# Altium PCB HVPSV3_GaN_system_5_5V_v2.PcbDoc (part 3 of 3)
Units mil, origin at the board's own origin, x right, y up, seen from the top; angles counter-clockwise.
Board outline 3914 x 4092 mil, 4 copper layers (Top Layer, Internal Plane 1, Internal Plane 2, Bottom Layer); 212 components, 159 nets, 925 pads, 655 vias.
Unrouted connection lines stored in the file: 4.
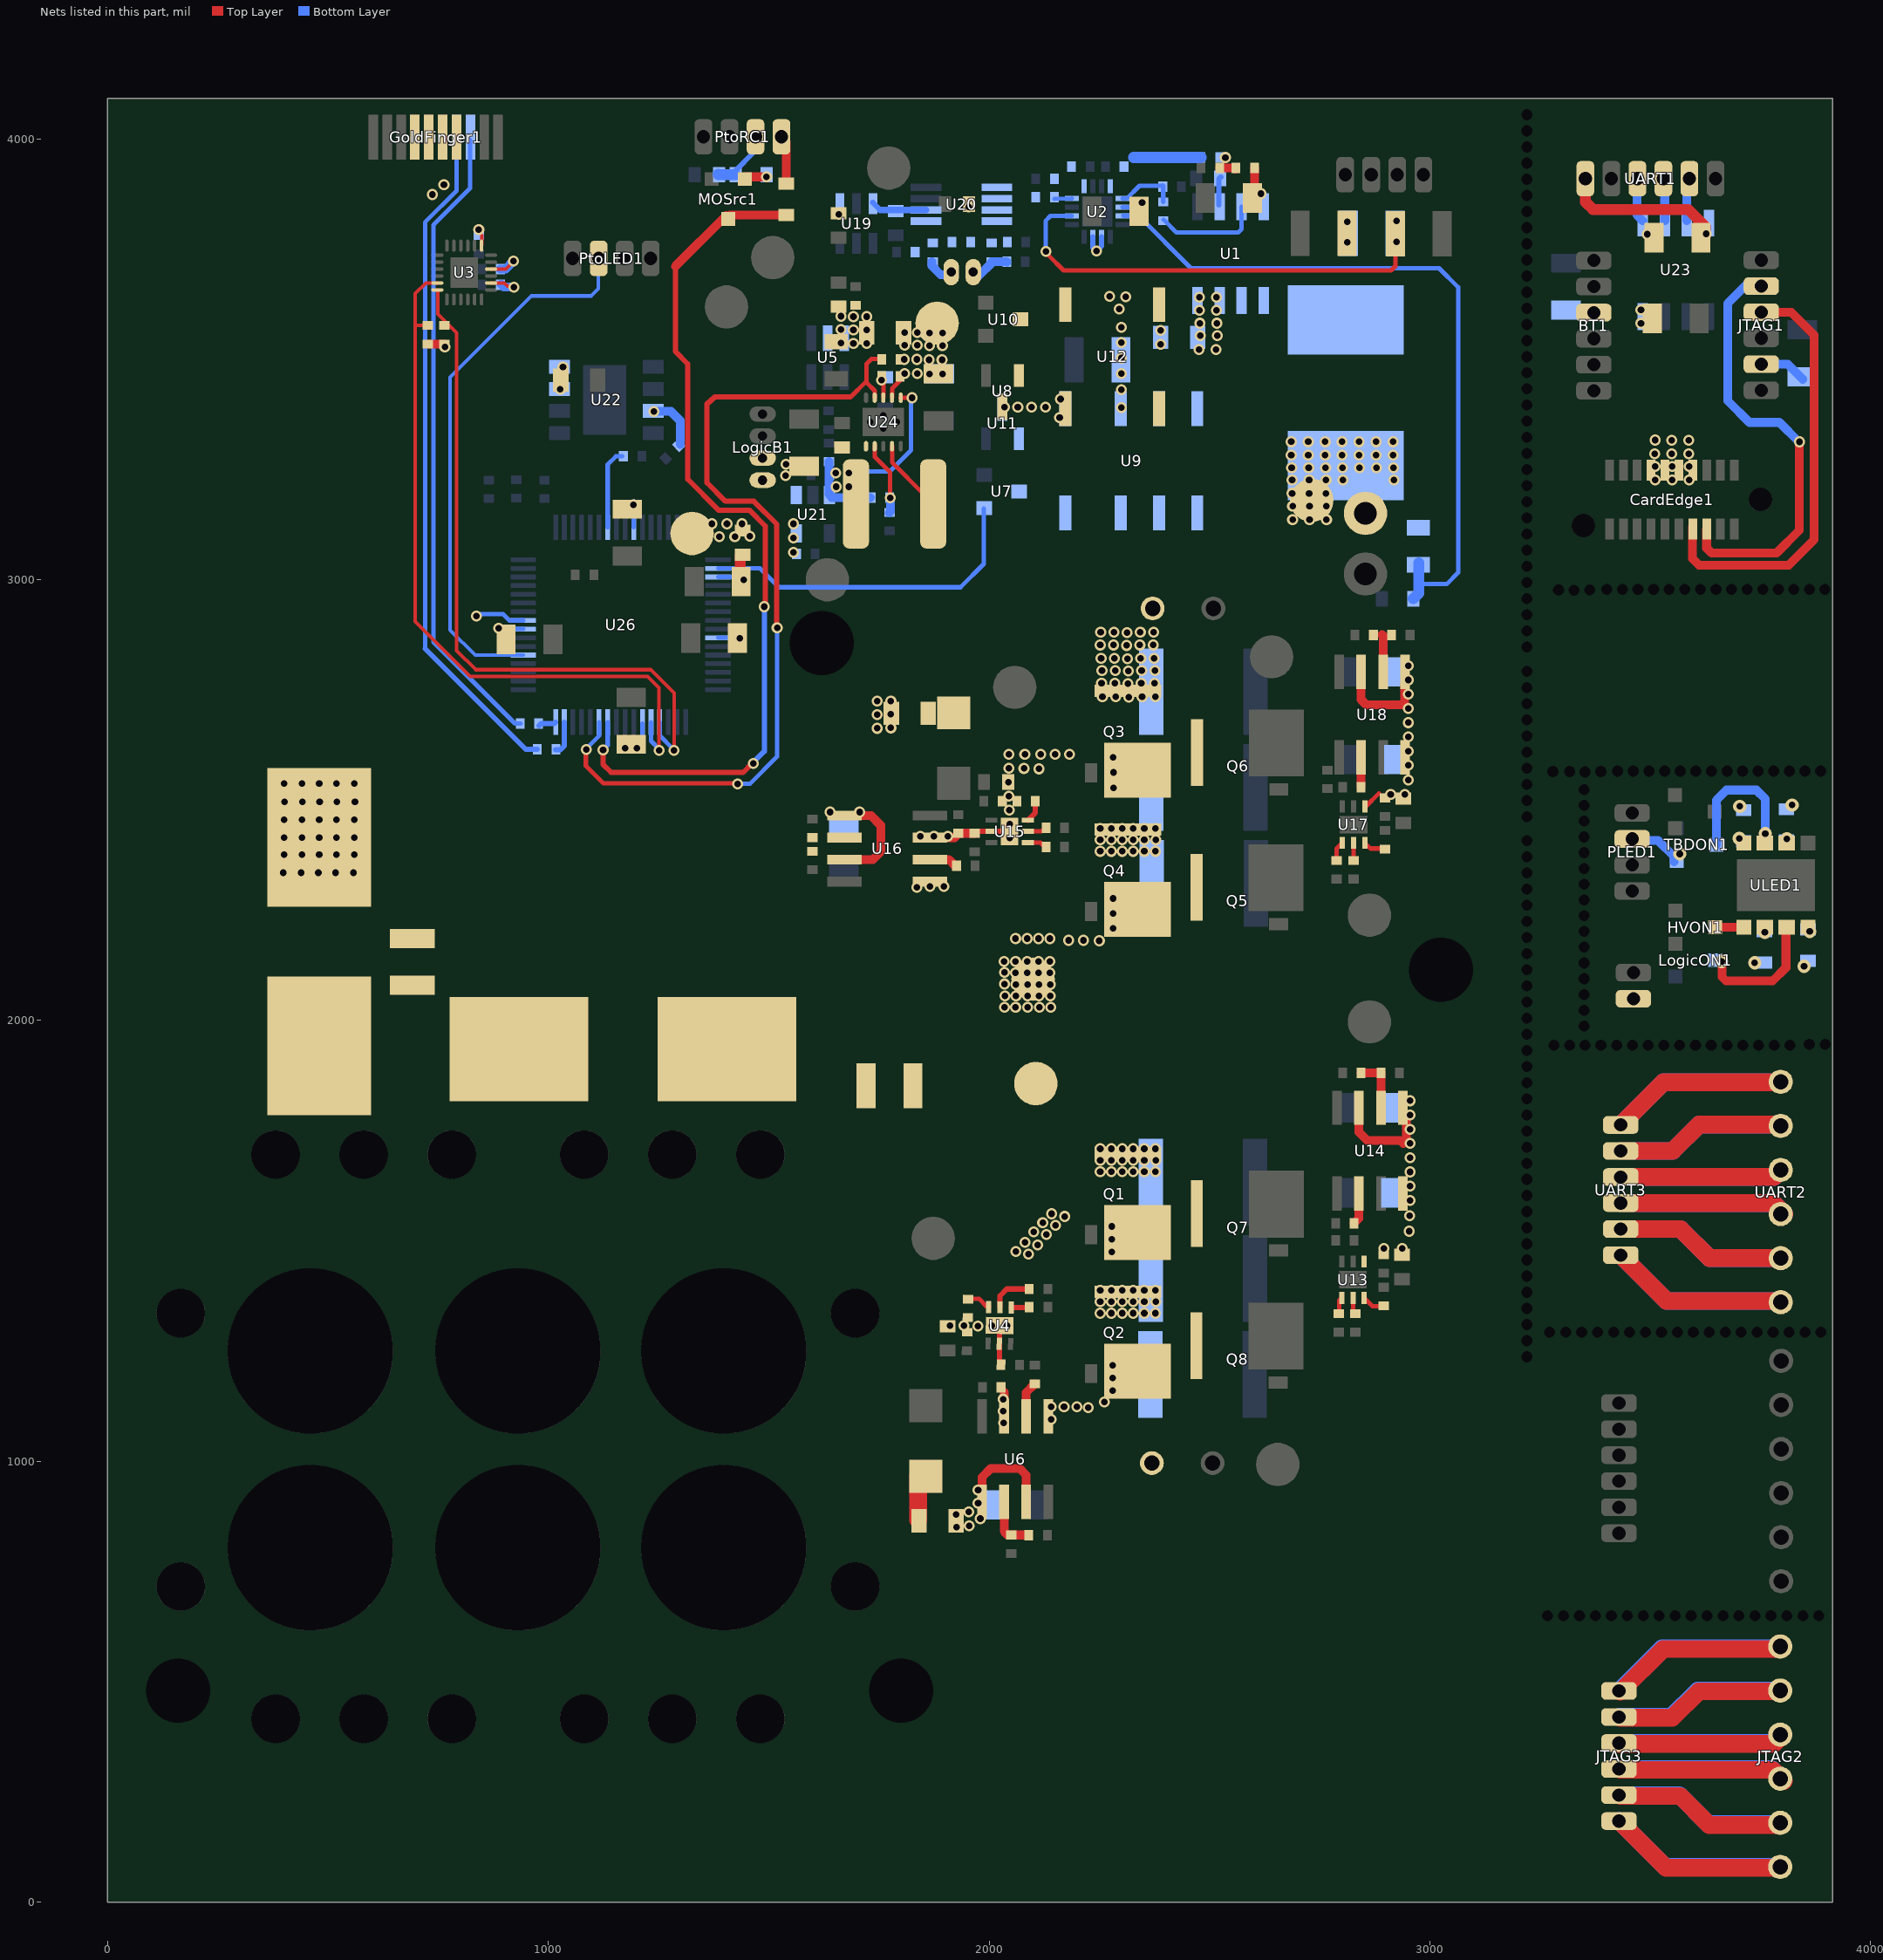
[diagram p4: the nets of this part, all layers, seen from the top]

## Via types
v1: diameter 25, hole 15, Top Layer to Bottom Layer, 625 vias
v2: diameter 30, hole 15, Top Layer to Bottom Layer, 30 vias

## Nets (pads, with @x,y where several pads share a name; then routed paths per layer and width w, separated by ;. In a path a pad name is that pad's centre, name@x,y a point inside that pad or via, vN(x,y) a via of type N, cw(c..) or ccw(c..) an arc to the next point about the centre after c; other vN are vias at no path point) (continued)
NetC4_1: C4.1 U1.6 | length 65.8
  Bottom Layer w12: U1.6@2521,3850.3 2521,3909 C4.1@2526,3914
NetC7_1: C7.1 U3.10 | length 94.5
  Top Layer w8: U3.10@870.02,3704.87 870.15,3705 903,3705 v1@920,3722
  Bottom Layer w20: C7.1@891,3705 903,3705 v1(921,3723)
NetC8_1: C8.1 C9.1 C10.1 C11.1 C12.1 C13.1 C14.1 C15.1 Q1.D Q2.D Q3.D Q4.D U9.3 U9.6 U12.3
  other v1: 2252,1336 2277,1336 2302,1336 2327,1336 2352,1336 2377,1336 2252,1362 2277,1362 2302,1362 2327,1362 2352,1362 2378,1362 2252,1388 2277,1388 2302,1388 2327,1388 2352,1388 2377,1388 2252,1657 2277,1657 2302,1657 2327,1657 2352,1657 2377,1657 2252,1683 2277,1683 2302,1683 2327,1683 2352,1683 2378,1683 2252,1709 2277,1709 2302,1709 2327,1709 2352,1709 2377,1709 2252,2384 2277,2384 2302,2384 2327,2384 2352,2384 2377,2384 2252,2410 2277,2410 2302,2410 2327,2410 2352,2410 2378,2410 2252,2436 2277,2436 2302,2436 2327,2436 2352,2436 2377,2436 2317,2734 2257,2735 2287,2735 2347,2735 2377,2735 2315,2764 2255,2765 2285,2765 2345,2765 2375,2765 2316,2793 2256,2794 2286,2794 2346,2794 2376,2794 2314,2821 2254,2822 2284,2822 2344,2822 2374,2822 2312,2851 2252,2852 2282,2852 2342,2852 2372,2852 2313,2880 2253,2881 2283,2881 2343,2881 2373,2881
NetC21_2: C21.2 C22.1 R31.2 U20.1
NetC22_2: C22.2 C24.1 R32.2 U20.8
NetC26_1: C26.1 U23.4 UART1.0 | length 370.3
  Top Layer w25: UART1.0@3352.83,3910 3352.83,3857.17 3370,3840 3586,3840 3625,3801 C26.1@3625,3779
  other v1: 3627,3785
NetC26_2: C26.2 U23.1 UART1.2 | length 83.1
  Bottom Layer w20: UART1.2@3470,3892 3470,3827.3 U23.1@3483,3814.3
  other v1: 3493,3784
NetC37_1: C37.1 U26.56 | length 64.5
  Bottom Layer w10: v1@883,2892 885,2890 886,2891 v1(887,2890) ; v1@884.16,2888.16 U26.56@943,2888.16
NetC38_1: C38.1 L3.2 U26.19 | length 120.1
  Top Layer w25: C38.1@1434,2993 1435,2994 L3.2@1435,3055
  Bottom Layer w10: U26.19@1385,3006.27 v1@1442.73,3006.27
  other v1: 1443,3000
NetCblock1_2: Cblock1.2 Lr1.2
NetCu1_1: Cu1.1 U4.6 | length 53
  Top Layer w10: Cu1.1@1955,1369 1977.48,1368.61 1994.8,1350.67 1998.95,1350.6 1999.54,1350.59 U4.6@1998.94,1350.01
NetCu8_1: Cu8.1 U13.6 | length 52
  Top Layer w10: U13.6@2851.12,1370.56 2869.46,1352.22 Cu8.1@2895.53,1352.22
NetCu13_1: Cu13.1 U15.6 | length 50.4
  Top Layer w12: U15.6@2087.9,2454.65 2105,2471.75 Cu13.1@2105,2498
NetCu20_1: Cu20.1 U17.6 | length 54.9
  Top Layer w10: U17.6@2852.41,2403.11 2865.2,2390.31 Cu20.1@2902,2390.31
NetDu1_A: Du1.A Ru5.2 | length 107.1
  Top Layer w25: Du1.A@1839,967 Du1.A@1844,972
  Top Layer w40: Ru5.2@1839,867 Du1.A@1839,967
NetDu2_A: Du2.A Ru14.2 | length 2.8
  Top Layer w25: Du2.A@1917,2697 Du2.A@1919,2695
NetFuse1_2: Fuse1.2 MainB1.2 R23.2 Vin.0
  other v1: 2688.5,3136.12 2727,3136.12 2765.5,3136.12 2688.5,3167.12 2727,3167.12 2765.5,3167.12 2687.5,3196.12 2726,3196.12 2764.5,3196.12 2687.5,3226.12 2726,3226.12 2764.5,3226.12 2803,3226.12 2918.5,3226.12 2686.5,3254.12 2725,3254.12 2763.5,3254.12 2802,3254.12 2840.5,3254.12 2879,3254.12 2917.5,3254.12 2685.5,3283.12 2724,3283.12 2762.5,3283.12 2801,3283.12 2839.5,3283.12 2878,3283.12 2916.5,3283.12 2685.5,3313.12 2724,3313.12 2762.5,3313.12 2801,3313.12 2839.5,3313.12 2878,3313.12 2916.5,3313.12
NetHVON1_2: HVON1.2 ULED1.1 | length 59.7
  Top Layer w20: HVON1.2@3647,2212 ULED1.1@3701,2212 ; ULED1.1@3707,2212 ULED1.1@3711,2208
NetJTAG2_0: JTAG2.0 JTAG3.0 | length 816.1
  Top Layer w40: JTAG3.0@3432,181.89 3535.89,78 JTAG2.0@3797,78
  Bottom Layer w40: JTAG3.0@3430,183.89 3533.89,80 JTAG2.0@3795,80
NetJTAG2_1: JTAG2.1 JTAG3.1 | length 794.8
  Top Layer w25: JTAG2.1@3795,175 JTAG2.1@3800,170
  Top Layer w40: JTAG3.1@3432,240.94 3568.06,240.94 3634,175 JTAG2.1@3795,175
  Bottom Layer w25: JTAG2.1@3793,177 JTAG2.1@3798,172
  Bottom Layer w40: JTAG3.1@3430,242.94 3566.06,242.94 3632,177 JTAG2.1@3793,177
NetJTAG2_2: JTAG2.2 JTAG3.2 | length 762.7
  Top Layer w40: JTAG3.2@3432,300 3778,300 JTAG2.2@3803,275
  Bottom Layer w40: JTAG3.2@3430,302 3776,302 JTAG2.2@3801,277
NetJTAG2_3: JTAG2.3 JTAG3.3 | length 744
  Top Layer w40: JTAG3.3@3432,359.06 3780.06,359.06 JTAG2.3@3797,376
  Bottom Layer w40: JTAG3.3@3430,361.06 3778.06,361.06 JTAG2.3@3795,378
NetJTAG2_4: JTAG2.4 JTAG3.4 | length 773.6
  Top Layer w40: JTAG3.4@3432,418.11 3550.11,418.11 3610,478 JTAG2.4@3794,478
  Bottom Layer w40: JTAG3.4@3430,420.11 3548.11,420.11 3608,480 JTAG2.4@3792,480
NetJTAG2_5: JTAG2.5 JTAG3.5 | length 804.2
  Top Layer w40: JTAG3.5@3432,477.17 3528.83,574 JTAG2.5@3794,574
  Bottom Layer w40: JTAG3.5@3430,479.17 3526.83,576 JTAG2.5@3792,576
NetL1_2: L1.2 U24.9 | length 148.3
  Top Layer w10: U24.9@1779.69,3303.88 U24.9@1779.69,3302.88 1779.69,3266.31 1853,3193 L1.2@1853,3186
NetLogicON1_2: LogicON1.2 ULED1.3 | length 283.6
  Top Layer w20: v2@3662,2135 3663,2134 3663,2099 3672,2090 ; 3678,2090 3778,2090 3808,2120 ULED1.3@3808,2212
  other v2: 3662,2134
NetMOSrc1_2: MOSrc1.2 Rrc1.1 U26.42 | length 2024.5
  Top Layer w12: v1@1124,2616 v1(1124,2614) 1124,2581 1142,2563 1442,2563 1462,2583 v1(1465,2583) ; 1288,3711 1288,3518 1316,3490 1316,3228 1386,3158 1456,3158 1492,3122 v1@1492,2940
  Top Layer w20: 1288,3711 MOSrc1.2@1403,3826 ; MOSrc1.2@1405,3820 1412.57,3827.57 Rrc1.1@1540,3827.57
  Bottom Layer w10: v1@1123,2613 v1(1124,2614) 1134.47,2624.47 U26.42@1134.47,2677
  Bottom Layer w12: v1(1465,2583) 1465,2586 1490,2611 1490,2938 v1@1491,2939
  other v1: 1490,2939
NetMOSrc1_3: MOSrc1.3 R49.2 | length 46
  Top Layer w20: MOSrc1.3@1449,3914 v1(1495,3914)
NetR1_1: R1.1 R4.1 R9.2 | length 36.8
  Top Layer w20: R9.2@2523,3934 2557,3934 R4.1@2559,3932
  other v1: 2536,3958
NetR1_2: R1.2 R5.1 U2.16 | length 153
  Bottom Layer w25: 2328,3958 R1.2@2481,3958
NetR2_1: R2.1 R3.2 U2.1 | length 143.2
  Bottom Layer w10: U2.1@2302.36,3864.69 2311.69,3864.69 2341,3894 R2.1@2395,3894 ; R2.1@2394,3895 R2.1@2395,3894 ; R3.2@2395,3857 R2.1@2395,3894
NetR3_1: R3.1 U1.7 | length 242.6
  Bottom Layer w10: R3.1@2396,3817 2425,3788 2565,3788 2573,3796 U1.7@2573,3846.3
NetR7_1: R7.1 R11.2
  other v1: 2813,3766 2813,3812
NetR10_2: R10.2 R13.2 U2.13
NetR11_1: R11.1 R17.2 U2.10 | length 1022.9
  Top Layer w10: v1@2135,3749 2135,3736 2169,3702 2912,3702 2921.85,3711.85 R17.2@2921.85,3785
  Bottom Layer w10: v1@2128,3747 2128,3814 2139.31,3825.31 U2.10@2188,3825.31
  other v1: 2129,3745 2924,3767 2924,3814
NetR12_1: R12.1 U2.12 | length 40
  Bottom Layer w10: R12.1@2148,3864 2148.07,3864 U2.12@2188,3864.69
NetR14_2: R14.2 R16.2 U6.2 | length 121.3
  Top Layer w20: U6.2@2034,908 2034,841 2042,833 R14.2@2045,833 ; R14.2@2049,833 R16.2@2089,833
NetR15_1: R15.1 U6.6 | length 62.3
  Top Layer w20: U6.6@2084,1122 2084,1156 R15.1@2104,1176
NetR18_1: R18.1 U12.6
  other v1: 2389,3534 2389,3566
NetR18_2: R18.2 U1.3 U1.4 U9.4 U9.5
  other v1: 2476,3522 2514.5,3522 2479,3554 2517.5,3554 2478,3582 2516.5,3582 2477,3611 2515.5,3611 2477,3641 2515.5,3641
NetR19_2: R19.2 R21.2 U14.2 | length 125.4
  Top Layer w20: R21.2@2844,1881 2888,1881 R19.2@2889,1880 ; U14.2@2889,1802 R19.2@2889,1880 ; R19.2@2889,1882 R19.2@2889,1880
NetR20_1: R20.1 U14.6 | length 72.6
  Top Layer w20: R20.1@2828,1540 2839,1551 U14.6@2839,1608
NetR22_2: R22.2 U9.2 U9.7
  other v1: 2300,3391 2300,3431 2300,3468 2300,3503 2300,3538 2300,3573 2295,3614 2310,3642 2273,3643
NetR23_1: R23.1 R26.2 U2.3 | length 1657.1
  Bottom Layer w10: U2.3@2305,3826 2339,3826 2458,3707 3021,3707 3064,3664 3064,3016 3038,2990 2978,2990
  Bottom Layer w25: R26.2@2962.43,2957 2975,2969.57 R23.1@2975,3038
NetR24_2: R24.2 R27.2 U16.2
NetR25_1: R25.1 U16.6 | length 64.2
  Top Layer w20: U16.6@1866,2365 1909,2365 R25.1@1924,2350
NetR28_2: R28.2 R30.2 U18.2 | length 86.8
  Top Layer w20: 2891,2876 2893,2874 2894,2874 U18.2@2894,2791
NetR29_1: R29.1 U18.6 | length 66
  Top Layer w20: R29.1@2844,2531 U18.6@2844,2597
NetR31_1: R31.1 TC1.1 | length 50.3
  Bottom Layer w20: R31.1@1870,3722 1870,3712 1890,3692 TC1.1@1902,3692
NetR32_1: R32.1 R33.2 TC1.2 | length 80.7
  Bottom Layer w20: TC1.2@1976,3689 2008,3721 R32.1@2008,3722 ; R32.1@2006,3722 R32.1@2008,3722 ; R33.2@2040,3721 2039,3722 R32.1@2008,3722
NetR36_1: R36.1 R39.2 U24.3 | length 35.9
  Top Layer w10: U24.3@1760,3414.12 R36.1@1760,3450
  other v1: 1756,3453
NetR37_1: R37.1 R40.2 U24.7 | length 166.5
  Top Layer w10: U24.7@1740.31,3303.88 U24.7@1740.31,3302.88 1740.31,3278.68 1775,3244 v1@1775,3187
  Bottom Layer w20: R40.2@1773,3152 R40.2@1774,3153 1776,3155 v1(1776,3186)
NetR46_1: R46.1 U26.7 | length 183.7
  Bottom Layer w10: U26.7@1134.47,3119 1134.47,3261.47 1153,3280 R46.1@1168,3280
NetR47_1: R47.1 U26.48 | length 40.7
  Bottom Layer w12: R47.1@979,2669 984,2674 1013.36,2674 U26.48@1016.36,2677
NetR48_1: R48.1 U26.47 | length 77.7
  Bottom Layer w12: R48.1@1016,2614 1027,2614 1036.05,2623.05 U26.47@1036.05,2677
NetRBLUE1_1: RBLUE1.1 ULED1.6 | length 8.5
  Top Layer w20: ULED1.6@3807,2402 ULED1.6@3813,2408
  other v2: 3810,2412
NetRgreen1_2: Rgreen1.2 ULED1.4 | length 2.8
  Top Layer w20: ULED1.4@3857,2212 ULED1.4@3859,2210
  other v2: 3862,2202
NetRred1_2: Rred1.2 ULED1.2
  other v2: 3760,2200
NetRu1_1: Ru1.1 U4.5 | length 98.8
  Top Layer w12: U4.5@2024.53,1349.56 2024.53,1375.53 2040,1391 Ru1.1@2091,1391
NetRu2_1: Ru2.1 U4.4 | length 40.3
  Top Layer w12: U4.4@2050.12,1349.11 2089.11,1349.11 Ru2.1@2090,1350
NetRu6_1: Ru6.1 U13.5 | length 40.4
  Top Layer w10: U13.5@2825.53,1370.56 2825.53,1336.47 Ru6.1@2830,1332
NetRu7_1: Ru7.1 U13.4 | length 36
  Top Layer w10: Ru7.1@2794,1337 2794,1364.63 U13.4@2799.93,1370.56
NetRu10_1: Ru10.1 U15.5 | length 44.2
  Top Layer w10: U15.5@2087.9,2429.06 2118.06,2429.06 Ru10.1@2128,2439
NetRu11_1: Ru11.1 U15.4 | length 47.7
  Top Layer w10: U15.4@2087.9,2403.47 2116.53,2403.47 Ru11.1@2130,2390
NetRu15_1: Ru15.1 U17.5 | length 40.9
  Top Layer w10: Ru15.1@2825,2363 2826.82,2364.82 U17.5@2826.82,2403.11
NetRu16_1: Ru16.1 U17.4 | length 43.6
  Top Layer w10: Ru16.1@2788,2365 2788,2389.88 U17.4@2801.23,2403.11
NetRWhite1_1: RWhite1.1 ULED1.8
  other v2: 3702,2413
NetTBDON1_2: TBDON1.2 ULED1.7 | length 331.8
  Bottom Layer w20: TBDON1.2@3650,2399 3650,2500 3673,2523 3741,2523 3761,2503 v2(3761,2424) 3761,2401
NetU7_2: U7.2 U9.8 U11.1
NetU8_1: U8.1 U10.2 U12.8
NetU23_2: U23.2 UART1.3 | length 74.8
  Bottom Layer w20: UART1.3@3528,3887 3533,3882 U23.2@3533,3814.3
NetU23_3: U23.3 UART1.4 | length 78.9
  Bottom Layer w20: U23.3@3583,3814.3 3583,3889 UART1.4@3586,3892
NetUART2_0: UART2.0 UART3.0 | length 816.1
  Top Layer w40: UART3.0@3433,1467.89 3536.89,1364 UART2.0@3798,1364
  Bottom Layer w40: UART3.0@3433,1467.89 3536.89,1364 UART2.0@3798,1364
NetUART2_1: UART2.1 UART3.1 | length 794.8
  Top Layer w25: UART2.1@3796,1461 UART2.1@3801,1456
  Top Layer w40: UART3.1@3433,1526.94 3569.06,1526.94 3635,1461 UART2.1@3796,1461
  Bottom Layer w25: UART2.1@3796,1461 UART2.1@3801,1456
  Bottom Layer w40: UART3.1@3433,1526.94 3569.06,1526.94 3635,1461 UART2.1@3796,1461
NetUART2_2: UART2.2 UART3.2 | length 762.7
  Top Layer w40: UART3.2@3433,1586 3779,1586 UART2.2@3804,1561
  Bottom Layer w40: UART3.2@3433,1586 3779,1586 UART2.2@3804,1561
NetUART2_3: UART2.3 UART3.3 | length 744
  Top Layer w40: UART3.3@3433,1645.06 3781.06,1645.06 UART2.3@3798,1662
  Bottom Layer w40: UART3.3@3433,1645.06 3781.06,1645.06 UART2.3@3798,1662
NetUART2_4: UART2.4 UART3.4 | length 773.6
  Top Layer w40: UART3.4@3433,1704.11 3551.11,1704.11 3611,1764 UART2.4@3795,1764
  Bottom Layer w40: UART3.4@3433,1704.11 3551.11,1704.11 3611,1764 UART2.4@3795,1764
NetUART2_5: UART2.5 UART3.5 | length 804.2
  Top Layer w40: UART3.5@3433,1763.17 3529.83,1860 UART2.5@3795,1860
  Bottom Layer w40: UART3.5@3433,1763.17 3529.83,1860 UART2.5@3795,1860
OPERATIONEN: U7.3 U26.18 | length 768.7
  Bottom Layer w10: U26.18@1385,3025.95 1480.05,3025.95 1523,2983 1935,2983 1988,3036 U7.3@1988,3162
PGEC: GoldFinger1.8 R47.2 | length 1448
  Bottom Layer w10: GoldFinger1.8@822,3998 822,3888 739,3805 739,2859 924,2674 R47.2@936,2674 R47.2@937,2674
PGEC_CE: CardEdge1.8 JTAG1.1 | length 958.2
  Top Layer w20: CardEdge1.8@3628.01,3115.14 3628.01,3071.99 3639,3061 3787,3061 3838,3112 v1@3838,3310
  Bottom Layer w20: JTAG1.1@3719,3670 3676,3627 3676,3406 3725,3357 3793,3357 v1@3837,3313
  other v1: 3839,3313
PGED: GoldFinger1.7 R48.2 | length 1540.7
  Bottom Layer w10: 720,2844 720,3811 792,3883 GoldFinger1.7@792,4005
  Bottom Layer w12: 720,2844 949,2615 R48.2@975,2615
PGED_CE: CardEdge1.7 JTAG1.2 | length 983.8
  Top Layer w20: CardEdge1.7@3596,3120 3596,3048 3611,3033 3814,3033 3872,3091 3872,3555 3819.94,3607.06 JTAG1.2@3752,3607.06
POWER+: Fuse1.1 U1.1 U1.2
PS_LBO: R38.1 U24.4 U26.43 | length 1998.6
  Top Layer w10: v1(1086,2615) 1085,2614 1085,2578 1125,2538 v1@1428,2538 ; 1685,3415 1688,3417 1718,3447 1722,3447 ; U24.4@1740.31,3413.12 1740.31,3428.68 1722,3447 ; R38.1@1755,3498 1752,3501 1733,3501 1722,3490 1722,3447
  Top Layer w12: v1@1515,2893 1518,2896 1518,3126 1466,3178 1402,3178 1360,3220 1360,3399 1378,3415 1685,3415
  Bottom Layer w10: v1@1088,2614 1088,2619 1114.79,2645.79 U26.43@1114.79,2677 ; v1(1429,2537) 1457,2537 1519,2599 v1(1519,2891) 1519,2892 v1@1516,2895
RC: C41.1 PtoRC1.3 R49.1 | length 140.3
  Bottom Layer w12: R49.1@1421,3925 1469.94,3973.94 PtoRC1.3@1469.94,4005
  Bottom Layer w25: C41.1@1385,3920 1386,3919 C41.1@1387,3919 R49.1@1424.57,3919
SCL: R6.1 U3.23 U26.37 | length 1655.7
  Top Layer w8: 700,3578 701,3577 R6.1@726,3577 ; U3.23@747.98,3673.38 722.38,3673.38 698,3649 698,2905 822,2781 1225,2781 1251,2755 1251,2617 v1@1249,2615
  Bottom Layer w10: U26.37@1232.9,2677 1232.9,2634.1 v1@1251.5,2615.5
  other v1: 1251,2613
SDA: R8.1 U3.24 U26.36 | length 1574.6
  Top Layer w8: U3.24@747.98,3657.63 749,3656.61 749,3603 792,3560 792,2839 835,2796 1232,2796 1285,2743 v1(1285,2613)
  Bottom Layer w10: U26.36@1252.58,2677 1252.58,2646.42 v1@1284,2615
TANKIN+: Cblock1.1 Cu1.2 Cu2.2 Cu3.2 Cu4.2 Cu6.2 Q1.S Q2.S Q7.D Q8.D TankIn+.0 U4.2 U4.EP U6.5 U6.7 | length 149.1
  Top Layer w12: Cu6.2@2023.09,1219.09 U4.2@2023.09,1266.9 2023.8,1307.59 U4.EP@2023.81,1308.23
  Top Layer w20: U6.7@2034,1111 Cu3.2@2034,1157
  Top Layer w30: U4.EP@2009.9,1308.47 U4.EP@2023.81,1308.23
  other v1: 2033,1087 2141,1095 2032,1114 2225,1122 2141,1124 2170,1124 2199,1124 2261.81,1134.39 2032,1141 2280,1160 2280,1189 2280,1218 1974.33,1307 1911,1308 1942.67,1308 2005.9,1307.9 2040.9,1307.9 2089.56,1470.09 2278,1475 2060.56,1476.09 2110.07,1490.6 2081.07,1496.6 2278,1504 2130.06,1514.59 2101.06,1520.59 2278,1533 2150.56,1535.09 2121.56,1541.09 2171.07,1555.6 2142.07,1561.6
TANKIN-: Cr1.1 Cu13.2 Cu14.2 Cu15.2 Cu16.2 Cu18.2 Q3.S Q4.S Q5.D Q6.D TankIn-.0 U15.2 U15.EP U16.5 U16.7 XFMER1.2 | length 190.2
  Top Layer w12: Cu18.2@1966,2423 1968,2425 1972.06,2429.06 U15.2@2005.22,2429.06 U15.EP@2046.56,2429.06
  Top Layer w20: U16.7@1866,2415 1906,2415 1921,2415 Cu15.2@1931,2425 ; Cu15.2@1930,2425 Cu18.2@1968,2425
  other v1: 2035,2030 2060,2030 2087,2030 2114,2030 2140,2030 2036,2056 2061,2056 2087,2056 2113,2056 2139,2056 2061,2082 2087,2082 2113,2082 2139,2082 2035,2083 2060,2108 2086,2108 2112,2108 2138,2108 2035,2109 2034,2134 2060,2134 2086,2134 2112,2134 2138,2134 2250,2181 2180.5,2182 2214.2,2182 2060,2186 2086,2186 2112,2186 2138,2186 2281,2209 2281,2243 2281,2277 1836,2302 1866,2304 1897,2304 398,2335.4 439,2335.4 478,2335.4 517,2335.4 558,2335.4 400,2376.2 441,2376.2 480,2376.2 519,2376.2 560,2376.2 2047,2414 400,2415 441,2415 480,2415 519,2415 560,2415 1844,2418 1875,2418 1906,2418 2047,2445.67 400,2455.8 441,2455.8 480,2455.8 519,2455.8 560,2455.8 2046,2477.33 401,2496.6 442,2496.6 481,2496.6 520,2496.6 561,2496.6 2045,2509 2282,2528 400,2537.4 441,2537.4 480,2537.4 519,2537.4 560,2537.4 2044,2540.67 2282,2563 2113,2571 2045,2572.33 2079,2572 2281,2597 2045,2604 2081,2604 2117,2604 2150,2604 2182,2604
TBD_LED: PLED1.3 TBDON1.3 | length 86.3
  Bottom Layer w20: PLED1.3@3495,2409 3517,2409 3554,2372 TBDON1.3@3554,2360
  other v2: 3567,2378
TBDON: PtoLED1.2 U26.53 | length 1257
  Bottom Layer w8: U26.53@943,2829.1 833.9,2829.1 777,2886 777,3459 962,3644 1097,3644 1113,3660 1113,3714 PtoLED1.2@1128,3729
TEMP: R12.2 U20.5 U20.6
TEMPREF: C17.1 U19.6 U20.2 | length 127.5
  Bottom Layer w12: U19.6@1736,3856 1752.8,3839.2
  Bottom Layer w15: 1752.8,3839.2 U20.2@1856.5,3839.2
V3.3: C2.1 C3.1 C20.1 C23.1 C36.1 C39.2 C40.2 GoldFinger1.14 GoldFinger1.15 GoldFinger1.16 GoldFinger1.17 L3.1 R6.2 R8.2 R41.2 U3.8 U3.13 U21.5 U22.3 U22.7 U22.8 U26.10 U26.26 U26.38 U26.57 V3.3.0 | length 524.2
  Top Layer w8: U3.13@849,3760 849,3781 ; U3.8@870.02,3673.38 899.62,3673.38 907,3666 v1@923,3666
  Top Layer w20: R6.2@726,3535 R8.2@764,3535
  Bottom Layer w10: v1@839,2919 842,2922 897,2922 911.16,2907.84 U26.57@943,2907.84 ; v1@1173,2621 1174,2620 v1(1174,2618) ; U26.10@1193.53,3119 1193.53,3177.53 v1@1194,3178 ; 1213.21,2632.21 U26.38@1213.21,2674 ; U26.26@1385,2868.47 v1@1426.47,2868.47
  Bottom Layer w20: C2.1@893,3670 899,3664 v1(922,3664) ; v1(1239,3382) 1276,3382 ; 1278,3382 1299,3361 R41.2@1299,3307
  other v1: 1201,2618 1434,2867 837,2918 1556,3062 1556,3094.5 1388,3098 1423,3098 1457,3099 1371.13,3127 1405.13,3127 1439.13,3127 1556,3127 1193,3170 1027,3432 1033,3483 765,3528 842,3794 737,3874 763,3896
V3.3_CE: BT1.3 C27.1 C34.2 C35.1 CardEdge1.14 CardEdge1.15 CardEdge1.16 CardEdge1.17 JTAG1.4 U23.8 | length 108.1
  Bottom Layer w20: JTAG1.4@3752,3488.94 3812.06,3488.94 C34.2@3846,3455
  other v1: 3511.5,3226.12 3550,3226.12 3588.5,3226.12 3511.5,3257.12 3550,3257.12 3588.5,3257.12 3510.5,3286.12 3549,3286.12 3587.5,3286.12 3549,3316.12 3587.5,3316.12 3511,3317 3479,3582 3479,3612
V5V: C28.1 C29.1 Cu5.1 Cu7.1 Cu9.1 Cu10.1 Cu11.1 Cu17.1 Cu19.1 Cu21.1 Cu22.1 Cu23.1 L2.1 R36.2 R38.2 Ru5.1 Ru14.1 U6.1 U6.3 U8.3 U9.1 U11.3 U12.1 U13.1 U14.1 U14.3 U14.8 U16.1 U16.3 U17.1 U18.1 U18.3 U18.8 U24.2 V5V.0 | length 953.4
  Top Layer w10: U24.2@1779.69,3414.12 1779.69,3433.69 R36.2@1799,3453 ; U17.1@2852.41,2485.78 2854.78,2485.78 2884,2515 ; Cu21.1@2898,2505 Cu21.1@2908,2505
  Top Layer w20: U16.1@1672,2465 1732,2465 1754,2443 1754,2383 1736,2365 U16.3@1684,2365 ; U6.1@1984,908 1984,964 2004,984 2069,984 2084,969 U6.3@2084,934 ; U14.3@2839,1802 2839,1747 2858,1728 2933,1728 2940,1721 ; U18.3@2844,2784 2844,2728 2856,2716 2943,2716 U18.1@2943,2762 ; v1@2947,1729 U14.1@2947,1775
  other v1: 1926,851 1955,854 1980,870 1925,879 1954,885 1975,905 1975,935 2896,1483 2937,1483 2953,1522 2954,1557 2955,1592 2955,1624.29 2955,1656.57 2955,1688.86 2955,1721.14 2955,1753.43 2955,1785.71 2955,1818 1639,2473 1706,2473 2911,2513 2943,2513 2951,2546 2951,2579 2951,2611.29 2951,2643.57 1746,2663 1777,2664 2951,2675.86 1746,2694 1777,2695 2951,2708.14 1746,2725 1777,2725 2951,2740.43 2951,2772.71 2951,2805 2160,3368 2035,3392 2065,3392 2096,3392 2128,3392 2162,3410 1865,3467 1894,3467 1808,3468 1837,3468 1864,3499 1893,3499 1807,3500 1836,3500 1865,3531 1894,3531 1808,3532 1837,3532 1865,3560 1894,3560 1808,3561 1837,3561
V5VANG: C1.1 C5.1 C6.1 C16.1 C18.1 C30.1 C31.1 L2.2 R4.2 U1.8 U2.2 U2.6 U2.7 U5.5 U5.6 U19.4 U20.7 | length 178.5
  Top Layer w20: C1.1@2595,3861 2602,3868 R4.2@2602,3934
  Bottom Layer w10: U2.2@2302.36,3845 2329,3845 2334,3850
  Bottom Layer w12: U2.7@2235.34,3777.98 2235.34,3753.66 v1@2241,3748 ; v1(2244,3746) 2255.02,3757.02 U2.6@2255.02,3777.98
  other v1: 1692,3536 1722,3536 1664,3537 1692,3566.5 1722,3566.5 1664,3567.5 1692,3597 1722,3597 1664,3598 1659,3829 1954,3846 2347,3856 2617,3876
VBAT: C19.1 C25.1 C33.1 L1.1 LogicB1.3 LogicB1.4 R34.2 R37.2 U21.1 U21.3 U24.1 U24.6 | length 529.7
  Top Layer w10: U24.1@1799.37,3413.12 1816.12,3413.12 1820.5,3417.5 v1@1822,3419
  Bottom Layer w10: U21.3@1641,3189 U21.3@1643,3186 ; 1676,3193 1676,3225 1697,3246 1775,3246 1823,3294 1823,3416 1821.5,3417.5 v1@1821,3418 ; R37.2@1732,3189 1733,3189 R37.2@1735,3187
  Bottom Layer w20: R34.2@1637,3268 1637,3242 1637,3194 U21.3@1639,3192 ; U21.3@1643,3186 R37.2@1731,3186
  other v1: 1653,3211 1682,3211 1538,3236 1652,3242 1682,3242 1539,3262 1825,3413
VBAT_LED: PVBAT1.1 RBLUE1.2 Rgreen1.1 Rred1.1 RWhite1.2
  other v2: 3849,2123 3737,2131 3703,2486 3822,2489
VRC: PtoRC1.4 Rrc1.2 | length 111.6
  Top Layer w20: PtoRC1.4@1529,4005 1540,3994 Rrc1.2@1540,3898.43 Rrc1.2@1540,3898
XFMER+: Cr1.2 Lr1.1 XFMER1.1
pads on no net: Bobbin1.1 Bobbin1.2 Bobbin1.4 CardEdge1.0 CardEdge1.18 CardEdge1.19 CardEdge1.20 GoldFinger1.18 GoldFinger1.19 GoldFinger1.20 JTAG1.0 PtoRC1.2 U3.1 U3.2 U3.3 U3.4 U3.5 U3.6 U3.7 U3.12 U3.14 U3.15 U3.16 U3.17 U3.19 U3.21 U8.2 U11.2 U19.3 U19.5 U20.4 U21.4 U26.1 U26.2 U26.3 U26.11 U26.22 U26.23 U26.24 U26.27 U26.28 U26.30 U26.35 U26.39 U26.40 U26.44 U26.45 U26.46 U26.50 U26.51 U26.58 U26.59 U26.64 UART1.1 UART1.5

## Polygon pours and split planes (outlines as drawn)
V5V on Bottom Layer "Bottom Layer-No Net 1" (solid, pour order 315): 1921,3446 1927,3452 1927,3566 1913,3580 1802,3580 1795,3573 1795,3455 1804,3446
VBAT on Bottom Layer "Bottom Layer-No Net 1" (solid, pour order 313): 1625,3179 1633,3171 1739,3171 1742,3174 1742,3269 1731,3280 1625,3280
VBAT on Bottom Layer "Bottom Layer-No Net 1" (solid, pour order 311): 1575,3195 1575,3282 1566,3291 1563,3294 1475,3294 1466,3294 1455,3283 1455,3217 1463,3209 1464,3208 1475,3208 1513,3208 1550,3171 1575,3171 1575,3195
GND on Bottom Layer "Bottom Layer-No Net 1" (solid, pour order 309): 1846,3384 1853,3391 1913,3391 1922,3382 1922,3333 1915,3326 1854,3326 1846,3334
GND on Bottom Layer "Bottom Layer-No Net 1" (solid, pour order 307): 1750,3402 1719,3402 1713,3396 1713,3333 1720,3326 1798,3326 1805,3333 1805,3392 1795,3402 1750,3402
GND on Bottom Layer "Bottom Layer-No Net 1" (solid, pour order 305): 20 vertices, not listed, extent 1455,3171 1645,3464
V5VANG on Bottom Layer "Bottom Layer-No Net 1" (solid, pour order 299): 1623,3519 1623,3591 1627,3595 1737,3595 1740,3592 1740,3525 1734,3519 1623,3519
GND on Bottom Layer "Bottom Layer-No Net 1" (solid, pour order 277): 2754,1589 2754,1834 2767,1847 2798,1847 2808,1837 2808,1576 2807,1575 2768,1575
V5V on Bottom Layer "Bottom Layer-No Net 1" (solid, pour order 275): 2913,1587 2913,1828 2923,1838 2958,1838 2967,1829 2967,1589 2951,1573 2927,1573
V5V on Bottom Layer "Bottom Layer-No Net 1" (solid, pour order 239): 2907,2573 2907,2814 2917,2824 2952,2824 2961,2815 2961,2575 2945,2559 2921,2559
GND on Bottom Layer "Bottom Layer-No Net 1" (solid, pour order 233): 1620,2342 1727,2342 1734,2335 1734,2296 1726,2288 1622,2288 1614,2296 1614,2335 1621,2342
V5V on Bottom Layer "Bottom Layer-No Net 1" (solid, pour order 231): 1620,2496 1727,2496 1734,2489 1734,2450 1726,2442 1622,2442 1614,2450 1614,2489 1621,2496
GND on Bottom Layer "Bottom Layer-No Net 1" (solid, pour order 205): 844,4055.5 844,3875.5 853,3867.5 854,3867.5 889,3867.5 897,3875.5 897,4011.5 897,4054.5 896,4055.5 895,4056.5 844,4056.5
NetC8_1 on Bottom Layer "Bottom Layer-No Net 1" (solid, pour order 175): 44 vertices, not listed, extent 2229,961 2395,2995
GND on Bottom Layer "GND" (solid, pour order 199): 1689,3768 1689,3789 1695,3795 1789,3795 1800,3784 1800,3738 1791,3729 1719,3729 1698,3729 1689,3738 1689,3767
GND on Bottom Layer "Bottom Layer-No Net 1" (solid, pour order 211): 780,3749 854,3749 859,3744 859,3669 859,3657 854,3652 852,3650 784,3650 774,3660 774,3726 774,3743
V3.3 on Bottom Layer "Bottom Layer-No Net 1" (solid, pour order 217): 1564.34,3148 1527,3148 1502,3173 1381,3173 1338,3130 1338,3094 1360,3072 1515,3072 1544,3043 1571,3043 1575.5,3047.5 1575.5,3138.58
V5V on Bottom Layer "Bottom Layer-No Net 1" (solid, pour order 283): 1942,851 1942,958 1949,965 1988,965 1996,957 1996,853 1988,845 1949,845 1942,852
GND on Bottom Layer "Bottom Layer-No Net 1" (solid, pour order 285): 2119,851 2119,958 2126,965 2165,965 2173,957 2173,853 2165,845 2126,845 2119,852
TANKIN- on Bottom Layer "Bottom Layer-No Net 1" (solid, pour order 291): 726,2061 604,2183 604,2496 604,2565 582,2587 369,2587 355,2573 355,1796 374,1777 696,1777 726,1807
GND on Bottom Layer "Bottom Layer-No Net 1" (solid, pour order 177): 2559,2979.37 2559,1052 2534,1027 2491,1027 2470.75,1006.75 2470.75,981.25 2487,965 2672,965 2706,999 2706,2155 2706,2955 2675,2986 2565,2986
NetR1_1 on Top Layer "Bottom Layer-No Net 1" (solid, pour order 333): 2513,3936 2513,3963 2522,3972 2560,3972 2570,3962 2570,3940 2570,3922 2569,3921 2514,3921 2513,3922
GND on Top Layer "Bottom Layer-No Net 1" (solid, pour order 329): 2123,940 2123,953 2129,959 2155,959 2160,954 2160,857 2156,853 2152,849 2127,849 2123,853 2123,859 2123,940
GND on Top Layer "Bottom Layer-No Net 1" (solid, pour order 327): 1710,2326 1723,2326 1729,2320 1729,2294 1724,2289 1627,2289 1623,2293 1619,2297 1619,2322 1623,2326 1629,2326 1710,2326
V5V on Top Layer "Bottom Layer-No Net 1" (solid, pour order 325): 1972,836 1908,836 1908,894.5 1942.5,894.5 1953,905 1953,977 1970,994 2009,994 2009,977 1996,964 1996,860
V5V on Top Layer "Bottom Layer-No Net 1" (solid, pour order 323): 1626,2468 1626,2491 1631,2496 1755,2496 1764,2487 1764,2440 1744,2440 1731,2453 1630,2453 1626,2457 1626,2468
GND on Top Layer "Bottom Layer-No Net 1" (solid, pour order 303): 1623,3454 1623,3489 1625,3491 1680,3491 1682,3489 1682,3439 1682,3438 1680,3436 1627,3436 1623,3440 1623,3454
GND on Top Layer "Bottom Layer-No Net 1" (solid, pour order 301): 1729,3668 1729,3770 1729,3785 1724,3790 1646,3790 1640,3784 1640,3661 1642,3659 1720,3659
V5VANG on Top Layer "Bottom Layer-No Net 1" (solid, pour order 297): 1740,3619 1727,3632 1726,3633 1638,3633 1624,3619 1624,3544 1624,3523 1627,3520 1730,3520 1740,3530
TANKIN+ on Top Layer "Bottom Layer-No Net 1" (solid, pour order 281): 28 vertices, not listed, extent 1894,1062 2047,1336
+BRVDDA on Top Layer "Bottom Layer-No Net 1" (solid, pour order 279): 2003,1281 1987,1281 1966,1260 1905,1260 1819,1174 1819,1141 1852,1108 1961,1108 1968,1101 1968,1063 1995,1063 1995,1244 2004,1253 2004,1281 1987,1281
+BRVOB on Top Layer "Bottom Layer-No Net 1" (solid, pour order 273): 2796,1502 2796,1550 2794,1552 2758,1552 2753,1547 2746,1540 2746,1493 2746,1468 2771,1443 2774,1440 2806,1440 2806,1487 2796,1497 2796,1502
GND on Top Layer "Bottom Layer-No Net 1" (solid, pour order 271): 2767,1570 2620,1570 2589,1601 2589,1847 2638,1896 2797,1896 2800,1893 2800,1711 2800,1571 2799,1570
V5V on Top Layer "Bottom Layer-No Net 1" (solid, pour order 269): 2947,1563.5 2940,1563.5 2926,1577.5 2926,1831 2929,1834 2971.5,1834 2980,1825.5 2980,1704.5 2980,1564.5 2979,1563.5 2940,1563.5
V5V on Top Layer "Bottom Layer-No Net 1" (solid, pour order 267): 2980,1477 2963,1460 2962,1459 2897,1459 2877,1459 2858,1440 2845,1440 2845,1467 2926,1546 2926,1527 2926,1584 2962,1584 2980,1566
-BRVOB on Top Layer "Bottom Layer-No Net 1" (solid, pour order 265): 2808,2512 2808,2513 2812,2517 2812,2541 2746,2541 2742,2537 2742,2520 2748,2514 2795,2472 2807,2472 2808,2473
GND on Top Layer "Bottom Layer-No Net 1" (solid, pour order 263): 23 vertices, not listed, extent 2802,2421 2964,2473
V5V on Top Layer "Bottom Layer-No Net 1" (solid, pour order 261): 2954,2562.5 2947,2562.5 2933,2576.5 2933,2830 2936,2833 2978.5,2833 2987,2824.5 2987,2703.5 2987,2563.5 2986,2562.5 2947,2562.5
GND on Top Layer "Bottom Layer-No Net 1" (solid, pour order 259): 2789,2558 2601,2558 2590,2569 2590,2871 2606,2887 2793,2887 2805,2875 2805,2574
NetR28_2 on Top Layer "Bottom Layer-No Net 1" (solid, pour order 255): 2922.25,2873 2922.25,2863 2919.25,2860 2862.25,2860 2860.25,2862 2860.25,2886 2863.25,2889 2920.75,2889 2922.25,2887.5
V5V on Top Layer "Bottom Layer-No Net 1" (solid, pour order 247): 2987,2512 2970,2495 2882,2495 2859,2472 2846,2472 2845,2473 2845,2499 2846,2500 2862,2500 2889,2527 2901,2527 2933,2559 2933,2619 2969,2619 2987,2601
V5V on Top Layer "Bottom Layer-No Net 1" (solid, pour order 237): 1730,2753 1786,2753 1796,2743 1796,2646 1786,2636 1729,2636 1719,2646 1719,2742
NetDu2_A on Top Layer "Bottom Layer-No Net 1" (solid, pour order 235): 1844,2724 1856,2736 1957,2736 1969,2724 1969,2677 1969,2668 1960,2659 1856,2659 1844,2671
NetR24_2 on Top Layer "Bottom Layer-No Net 1" (solid, pour order 227): 1586,2426 1633,2426 1708,2426 1708,2404 1625,2404 1612,2391 1612,2373 1586,2373
GND_CE on Top Layer "Bottom Layer-No Net 1" (solid, pour order 209): 3692,3271 3701,3271 3710,3262 3710,3097 3702,3089 3650,3089 3650,3270 3651,3271
GND on Top Layer "Bottom Layer-No Net 1" (solid, pour order 203): 844,4055 844,3875 853,3867 854,3867 889,3867 897,3875 897,4011 897,4054 896,4055 895,4056 844,4056
V3.3 on Top Layer "Bottom Layer-No Net 1" (solid, pour order 201): 686,4055 802,4055 802,3948 802,3875 784,3857 783,3856 719,3856 686,3889
V5V on Top Layer "Bottom Layer-No Net 1" (solid, pour order 197): 1788,3455 1788,3574 1793,3579 1913,3579 1920,3572 1927,3565 1927,3462 1927,3452 1921,3446 1796,3446
NetC8_1 on Top Layer "Bottom Layer-No Net 1" (solid, pour order 185): 2230,1391 2241,1402 2391,1402 2400,1393 2400,1333 2389,1322 2241,1322 2230,1333
NetC8_1 on Top Layer "Bottom Layer-No Net 1" (solid, pour order 183): 2230,1712 2241,1723 2391,1723 2400,1714 2400,1654 2389,1643 2241,1643 2230,1654
TANKIN+ on Top Layer "Bottom Layer-No Net 1" (solid, pour order 181): 24 vertices, not listed, extent 1944,1142 2532.53,1939
TANKIN- on Top Layer "Bottom Layer-No Net 1" (solid, pour order 163): 24 vertices, not listed, extent 2021,2015 2532,2707.42
-BRDN1 on Top Layer "Bottom Layer-No Net 1" (solid, pour order 173): 2634,2220 2634,2173 2638,2169 2711,2169 2715,2173 2715,2228 2712,2231 2711,2232 2639,2232 2634,2232
HV7V on Top Layer "Bottom Layer-No Net 1" (solid, pour order 154): 2727,3813 2727,3858 2753,3884 2757,3888 2828,3888 2828,3920 2821,3927 2700,3927 2688,3915 2684,3911 2684,3815 2689,3810 2720,3810 2724,3810 2727,3813
GND on Top Layer "Bottom Layer-No Net 1" (solid, pour order 152): 2855,3957 3045,3957 3050,3952 3050,3743 3042,3735 3017,3735 3007,3743 3007,3875 3003,3879 2855,3879 2849,3885 2849,3949
NetCblock1_2 on Top Layer "Bottom Layer-No Net" (solid, pour order 92): 1743.41,1795.32 1727.1,1779 1268.62,1779 1248.41,1799.21 1248.41,2077.82 1264.59,2094 1721.41,2094 1743.41,2072
XFMER+ on Top Layer "Bottom Layer-No Net" (solid, pour order 124): 1090,1800.48 1074.51,1784 882.25,1784 375.75,1784 363.25,1799.95 363.25,1871.48 363.25,2088.48 375.75,2099 1063,2099 1090,2072
TANKIN- on Top Layer "Bottom Layer-No Net 1" (solid, pour order 128): 796,2170 371,2170 359,2182 359,2576 367,2584 609,2584 624,2569 624,2283 657,2250 829,2250 834,2245 834,2176 828,2170
NetC8_1 on Top Layer "Bottom Layer-No Net 1" (solid, pour order 161): 2230,2439 2241,2450 2391,2450 2400,2441 2400,2381 2389,2370 2241,2370 2230,2381
VBAT on Top Layer "Bottom Layer-No Net 1" (solid, pour order 213): 19 vertices, not listed, extent 1458,3086 1727,3315
GND on Top Layer "Bottom Layer-No Net 1" (solid, pour order 215): 1918,3382.33 1909.33,3391 1796,3391 1464,3391 1455,3382 1455,3332.73 1460.69,3326 1909.33,3326 1918,3333
-BRVDDA on Top Layer "Bottom Layer-No Net 1" (solid, pour order 219): 19 vertices, not listed, extent 1827,2448 2019,2581
TANKIN- on Top Layer "Bottom Layer-No Net 1" (solid, pour order 223): 30 vertices, not listed, extent 1827,2402 2073,2558
-BRVOA on Top Layer "Bottom Layer-No Net 1" (solid, pour order 225): 2019,2409 1995,2409 1979,2393 1955,2393 1955,2342 1959,2338 1981,2338 2019,2376
TANKIN- on Top Layer "Bottom Layer-No Net 1" (solid, pour order 289): 2275,2630 2039,2630 2029,2623 2029,2540 2058,2540 2062,2543 2129.46,2543 2209.38,2605 2275,2605
TANKIN+ on Top Layer "Bottom Layer-No Net 1" (solid, pour order 293): 2268,1582 2125,1582 2041.5,1498.5 2041.5,1462 2048,1453 2097,1453 2205,1561 2254,1561 2268,1549.8
TANKIN+ on Top Layer "Bottom Layer-No Net 1" (solid, pour order 295): 2123,1140 2239,1140 2261,1162 2262,1163 2262,1241 2285,1241 2302,1224 2302,1147 2261,1106 2190,1106 2145,1061 2123,1061
V3.3_CE on Top Layer "Bottom Layer-No Net 1" (solid, pour order 317): 3606,3271 3606,3326 3597,3335 3497,3335 3492,3330 3492,3214 3493,3213 3503,3203 3594,3203 3606,3215 3606,3271
+BRVOA on Top Layer "Bottom Layer-No Net 1" (solid, pour order 321): 2043,1280 2043,1256 2059,1240 2059,1216 2110,1216 2116,1222 2116,1240 2076,1280
TANKIN+ on Top Layer "Bottom Layer-No Net" (solid, pour order 331): 1974.95,1779 1828,1779 1805.9,1801.1 1805.9,2075.9 1825.9,2095.9 1902.9,2095.9 1913.9,2084.9 1913.9,1957 1931.9,1939 1974.95,1939
-BRUP1 on Top Layer "Bottom Layer-No Net 1" (solid, pour order 335): 17 vertices, not listed, extent 2160,2226 2245,2585
+BRUP1 on Top Layer "Bottom Layer-No Net 1" (solid, pour order 337): 22 vertices, not listed, extent 2123,1176 2245,1536
-BRDN1 on Top Layer "Bottom Layer-No Net 1" (solid, pour order 339): 30 vertices, not listed, extent 2636,2169 2839,2538
+BRDN1 on Top Layer "Bottom Layer-No Net 1" (solid, pour order 341): 23 vertices, not listed, extent 2634,1165 2850,1492
V3.3_CE on Internal Plane 1 (split plane): 3893.9,4071.9 3893.9,3005.86 3891,3006.09 3245.08,3006.09 3245.08,4071.9
V3.3_CE on Internal Plane 1 (split plane): 3893.9,2598.09 3245.08,2598.09 3245.08,2945.91 3891,2945.91 3893.9,2946.14
no net on Internal Plane 1 (split plane): 2307.34,2342.66 2306.94,2342.78 2304.74,2343 2307,2343
VBAT_LED on Internal Plane 1 (split plane): 21 vertices, not listed, extent 3399,1985 3893.9,2537.91
TANKIN+ on Internal Plane 1 (split plane): 56 vertices, not listed, extent 1850.08,1067.08 2300.93,1584.2
V5VANG on Internal Plane 1 (split plane): 37 vertices, not listed, extent 1349.1,3412.1 3094.1,3988.9
TANKIN- on Internal Plane 1 (split plane): 38 vertices, not listed, extent 1823.08,2167 2308.93,2625.92
VBAT on Internal Plane 1 (split plane): 19 vertices, not listed, extent 1445.1,3133.21 1715.9,3401.9
V3.3 on Internal Plane 1 (split plane): 88 vertices, not listed, extent 573.1,792.1 3195.04,4071.9
V5V on Internal Plane 1 (split plane): 170 vertices, not listed, extent 1422.62,574 3093.9,3678.9
GND_CE on Internal Plane 2 (split plane): 3893.9,2599.47 3246.98,2599.09 3243.08,2598.78 3243.08,2946.9 3893.9,2947.29
GND_LED on Internal Plane 2 (split plane): 3893.9,2103.9 3842,2052 3609.5,2052 3537,1986 3431,1986 3399.62,2017.38 3399.62,2263.88 3399.62,2488.86 3449.76,2539.01 3449.76,2539.02 3893.9,2539.29
GND_CE on Internal Plane 2 (split plane): 3893.9,4071.9 3893.9,3007.48 3243.08,3007.09 3243.08,4059.14 3242.77,4063.06 3241.85,4066.88 3240.34,4070.52 3239.5,4071.9
GND on Internal Plane 2 (split plane): 83 vertices, not listed, extent 573.1,575 3196.5,4071.9

## Keep-outs
Keep-Out Layer:
  lines w10: 552,4094 932,4094 932,3834 1178,3834 ; 552,4095 552,2611 538.9,2597.9 352.9,2597.9 339,2584 339,1814 2,1477 2,323 66,259 1836,259 2354,777 2814,777 3221,1184 3221,724 3221,-3 3914,-3 3914,3776 3914,4043 3914,4091 3654,4091 3653,4091 1177,4091 ; 1177,3834 1177,4092

## Other copper
Top Layer:
  region net NetC8_1: 2372,3429 2400,3429 2400,3085 2400,2737.4 2386.33,2721 2243.6,2721 2230,2739.55 2230,3052.21 2243,3068 2350,3068 2372,3085
  region net NetR22_2: 2287,3380 2287,3590 2255,3622 2255,3664 2327,3664 2331,3660 2331,3615 2314,3598 2314,3377 2290,3377
  region net NetU8_1: 2187,3670 2177,3680 2064,3680 2051,3667 2051,3575 2058,3568 2058,3438 2060,3436 2102,3436 2113,3447 2113,3536 2141,3564 2178,3564 2187,3573
  region net V5V: 2020,3420 2042,3420 2052,3410 2119,3410 2136,3427 2187,3427 2187,3349 2134,3349 2111,3372 2053,3372 2041,3360 2020,3360
  region: 695,3684
  region: 695,3684
  region: 695,3684
  region: 695,3684
  region: 695,3684
  region: 695,3684
  region net NetR18_1: 2370,3611 2373,3614 2400,3614 2406,3608 2406,3525 2403,3522 2375,3522 2370,3527
  region net NetFuse1_2: 2665,3129.86 2665,3324 2678,3337 2961.25,3337 3001.5,3281 3001.5,3258 3000.5,3111.5 2991.44,3101 2699.58,3101
  region net NetR18_2: 2535,3664 2535,3511.08 2524.27,3502 2469.18,3502 2458,3511.46 2458,3650 2457,3651 2466,3660 2466,3664
Bottom Layer:
  region net NetR22_2: 2285,3138 2285,3591 2255,3621 2255,3663 2328,3663 2331,3660 2331,3614 2314,3597 2314,3112 2285,3112
  region net NetU7_2: 2188,3120.94 2181.57,3113 2062,3113 2051.86,3123.14 2051.86,3181.14 2049.5,3186 2049.5,3207.5 2058,3216 2058,3320 2058,3346 2084,3346 2099,3328 2099,3238 2138,3191 2180,3191 2188,3186
  region net V5V: 2020,3420 2042,3420 2052,3410 2119,3410 2136,3427 2187,3427 2187,3349 2134,3349 2111,3372 2053,3372 2041,3360 2020,3360
  region net TEMP: 2113,3880 2068,3880 2063,3885 2063,3896 2060,3899 1983,3899 1983,3856 2113,3856 2114,3857 2114,3879
  region net V5VANG: 2018,3848 1971,3848 1965,3854 1965,3869 1943,3869 1941,3867 1941,3833 1942,3831 1945,3831 2015,3831 2018,3834
  region net NetC22_2: 2052.5,3817 2047.5,3822 1961.5,3822 1952.5,3813 1952.5,3755 1953.5,3754 2050.5,3754 2052.5,3756
  region net NetC21_2: 1822,3817 1827,3822 1913,3822 1922,3813 1922,3755 1921,3754 1822,3754
  region net AN_VOUT: 2201,3811 2204,3808 2204,3794 2221,3794 2221,3756 2219,3754 2162,3754 2157,3759 2157,3807 2161,3811
  region net NetR10_2: 2221,3881 2221,3899 2212,3908 2203,3908 2197,3914 2197,3948 2145,3948 2138,3941 2138,3900 2140,3898 2180,3898 2198,3880 2220,3880
  region net NetR1_2: 2269,3907 2270,3908 2279,3908 2296,3925 2296,3951 2315,3970 2362,3970 2367,3965 2367,3946 2335,3914 2300,3914 2281,3895 2281,3877 2269,3877
  region net V3.3: 1188,3155 1178,3165 1173,3165 1173,3185 1196,3185 1200,3181 1200,3164 1199,3162 1199,3140 1188,3140
  region net V3.3: 1160,2630 1165,2635 1215,2635 1218,2632 1218,2605 1214,2601 1165,2601 1160,2606
  region net NetR18_2: 2536,3663.5 2536,3117 2522,3106 2471,3106 2458,3117 2459,3649.5 2458,3650.5 2467,3659.5 2467,3663.5
  region net POWER+: 2561,3483 2561,3513 2561,3530 2561,3541.5 2561,3565 2561,3652 2576,3667 2595,3667 2908,3667 2940,3635 2940,3612 2939.11,3481.24 2927.69,3468 2576,3468
  region net V5VANG: 2328,3851 2335,3858 2335,3865 2340,3870 2358,3870 2362,3866 2362,3843 2359,3840 2328,3840
  region net NetFuse1_2: 2665,3133.84 2665,3324 2679,3338 2961.47,3338 3001,3283 3001,3260 3000.13,3132.86 2972.65,3101 2697.84,3101
  region net GND: 1308,2726 1336,2754 1336,3045 1313,3068 1033,3068 1000,3035 1000,2751 1025,2726
  region net AN_VBAT: 2269,3794 2285,3794 2287,3796 2287,3811 2330,3811 2340,3801 2340,3732 2329,3721 2276,3721 2269,3728
  region net GND: 2483,3929 2481,3931 2449,3931 2443,3925 2443,3828 2456,3815 2483,3815
  region net NetC8_1: 2372,3428 2389,3428 2401,3428 2401,3318 2401,3219 2401,3085 2401,2960 2395,2954 2252,2954 2229,2978 2229,3051 2243,3068 2350,3068 2372,3085
  region net TANKIN-: 2154,2015 2009.89,2015 1921.5,1909.57 1921.5,1809 1898,1779 677,1779 677,2095 1839,2095 1943,2199 2150,2199 2159,2190 2159,2020
  region net GND: 2487.74,3061.74 2888.26,3061.74 2905,3045 2905,2893 2894.5,2882.5 2844,2882.5 2835,2873.5 2835,2559 2829,2552 2564,2552 2564,2875 2538,2901 2486.13,2901 2474.06,2913.06 2474.06,3048.06
Internal Plane 2 (plane layer: these items are gaps in the copper):
  region: 1951.45,2164.54 2212.55,2164.55 2183,2135 2183,2021 2159,1997 1987.54,1997 1942,2042.54 1942,2152.09
  region: 530.06,2782.31 855.38,2457 1413.41,2457 1423,2447.41 1423,2240.99 1452.99,2211 1926.5,2211 2034.31,2103.19 2034.31,1847.19 1964.98,1770 1810.6,1770 1746.5,1693.99 1746.5,649 1820.5,575 2145.5,575 2053.08,482.58 2053.08,19.19 -70.5,19.19 -70.5,2782.31
  region: 3449.76,2539.01 3449.76,2558.24 3420,2588 3275.75,2588 3229,2538.31 3229,0 3910,0 3910,2076 3910,2120 3842,2052 3609.5,2052 3537,1986 3431,1986 3399.62,2017.38 3399.62,2263.88 3399.62,2488.86
  region: 1821,1305 1821,1106 1894,1033 2159,1033 2201,1075 2246,1075 2317,1146 2317,1243 2282,1278 2225,1278 2204,1299 2204,1414 2220,1430 2299,1430 2320,1451 2317,1454 2317,1558 2268,1607 2123,1607
  region: 1789.45,2520.45 1918,2649 2286,2649 2333,2602 2333,2527 2310,2504 2239,2504 2201.5,2466.5 2201.5,2360 2248.25,2313.25 2303,2313.25 2320,2296.25 2320,2191 2272,2143 1924,2143 1790.45,2276.55
  region: 2943,3242 2943,3173 2870,3100 2764,3100 2760,3104 2760,3227 2775,3242
  lines w50: 3218,1171 3218,4059.14 ; 3773,1913 3783,1923
  lines w60: 3242,2976.99 3903,2977.39 ; 3247,2568.99 3904,2569.39
Internal Plane 1 (plane layer: these items are gaps in the copper):
  region: 1808.31,2074.96 2002.11,2074.96 2028,2049 2028,1910.96 2006,1888.96 1816,1888.96 1799,1905.96 1799,2062.68
  region: 3214,3995 3111,4098 3213,4098 3214,4099
  region: 3893,2398 3714,2398 3686,2370 3686,2249 3710,2225 3878,2225 3878,2198 3899,2198 3914,2213 3914,2377
  region: 3034,3571 3095,3632 3100,3632 3100,3510 3096,3506 3035,3567 3035,3571
  region: 555.72,2762 860.72,2457 1397.28,2457 1422.62,2481.45 1422.62,2238 1449.62,2211 1893,2211 2075.36,2028.64 2211,2028.64 2211,1733 2168.5,1775.5 1822.22,1775.5 1745,1685.41 1745,650 1821,574 2147,574 2049.17,476.17 2049.17,15.33 -50,16.23 -50,2762
  region: 3446,2535 3446,2561 3423,2587 3381,2587 3361,2567 3217,2567 3217,0.01 3911,0.02 3911,2070 3911,2112 3911,2126.75 3891.25,2098.75 3845.5,2053 3610.5,2053 3537.5,1985 3428.5,1985 3399,2022.55 3399,2488
  region: 2313,2632 2417,2632 2454,2669 2454,2698 2465,2709 2518,2709 2532,2695 2532,2064 2483,2015 2077,2015 2011,1949 1898,1949 1898,2167 2276,2167 2326,2217 2326,2324 2307,2343 2254,2343 2219,2378 2219,2461 2252,2494 2290,2494 2322,2526 2322,2622 2313,2631
  region: 2203,1638 2203,2016 2264,2077 2523,2077 2532,2068 2532,1172 2502,1142 2318,1142 2318,1234 2288,1264 2223,1264 2189.5,1297.5 2189.5,1417.5 2215,1443 2288,1443 2308,1471 2308,1554 2265,1597 2162,1597
  region: 2946,3244 2946,3175 2873,3102 2767,3102 2763,3106 2763,3229 2778,3244
  region: 1440,3408 1623,3408 1625,3406 1625,3326 1604,3305 1440,3305
  lines w0: 2633.9,1607.9 2641.9,1607.9
  lines w10: 1289,2452 1401,2452 1542,2593 1542,2848 1649,2955 1649,3126 ; 1451,3407 1373,3407 1344,3436 1344,3611 1445,3712 1604.75,3871.75 1727,3994 3045,3994 3099,3940 3099,3921 ; 1700,3407 1447,3407 1440,3400 1440,3191 1443,3188 1587,3188 1649,3126 ; 1703,3272 1703,3458 1763,3518 1763,3573 1791,3601 1908,3601 1991,3684 2148,3684 2299,3684 2346,3637 2413,3570 3033,3570 3099,3636 3099,3919 ; 1704.5,3270.5 1721,3254 1721,3198 1649,3126 ; 2599,777 2654,777 2800,923 2820,943 2821,943 2873,995 3033,1155 3033,1156 3099,1222 3099,3201 3099,3639 ; 3033,3569 3099,3503
  lines w30: 1863,2208 1876,2208 1971,2113 ; 2251,1609 2316,1544 2316,1467 2291,1442 2213,1442 2189,1418 2189,1291 2217,1263 2290,1263 2318,1235 ; 2322,2615 2322,2517 2295,2490 2244,2490 2212,2458 2212,2364 2248,2328 2304,2328 2324,2308 2324,2158
  lines w50: 1863,2208 1798,2273 1798,2530 1919,2651 2286,2651 2322,2615 ; 1908,1387 1825,1304 1825,1096 1879,1042 2146,1042 2180,1076 ; 1921,1400 1969,1448 2130,1609 2251,1609 ; 2169,1064 2189,1084 2271,1084 2318,1131 2318,1235 ; 3220,1192 3220,4083.29 ; 3773,1912 3783,1922 ; 3907,1924 3909,1926
  lines w60: 3229,2976 3891,2976 ; 3234,2568 3903,2568

## Silkscreen, mask and mechanical layers (free items; w line width, h text height)
Top Overlay:
  text "HV7V" at 2642,3944 h30 r270
  text "+" at 1608,3938 h60
  text "+" at 2689,3917 h60
  text "*" at 3248,3853 h60
  text "*" at 3731,3787 h60
  text "+" at 1851,3652 h30
  text "-" at 2003,3651 h30
  text "-" at 1465,3386 h60
  text "*" at 3380,3309 h60
  text "+" at 1467,3148 h60
  text "+" at 1889,3098 h30
  text "1" at 3544,2534 h60
  text "-BrVOB1" at 2780,2481 h20 r135
  text "-BrVOA1" at 2024,2380 h20 r225
  text "2" at 3590,2363 h60
  text "3" at 3567,2284 h60
  text "-" at 3532,2134 h60
  text "HVPS_SPRC inverter V3" at 738,2117 h80
  text "4" at 3592,2085 h60
  text "+" at 3555,2028 h80 r180
  text "1 - 4: 200, TBD, HV, LG / Green: LogicOn / Blue: 200VOn; Red: HVOn" at 3569,1977 h40
  text "+BrVOB1" at 2764,1442 h30 r90
  text "*" at 3423,1348 h60
  text "*" at 3861,1330 h60
  text "+BrVOA1" at 2075,1288 h20 r315
  text "*" at 3412,718 h60
  text "*" at 3864,692 h60
  text "*" at 3405,60 h60
  text "*" at 3861,44 h60
Bottom Overlay:
  text "*" at 3288,3853 h60
  text "*" at 3771,3787 h60
  text "-" at 1537,3373 h60
  text "*" at 3420,3309 h60
  text "+" at 1542,3186 h60
  text "+" at 1889,3099 h30
  text "*" at 3463,1348 h60
  text "*" at 3901,1330 h60
  text "*" at 3452,718 h60
  text "*" at 3904,692 h60
  text "*" at 3445,60 h60
  text "*" at 3901,44 h60
Top Solder:
  region: 828,2170 834,2176 834.01,2244.99 829,2250 658,2250 625,2283 625,2568 609.25,2583.75 364.75,2583.75 356.25,2575.25 356.25,2180.25 366.5,2170
  region: 1802,1795 1818,1779 1856,1779 1856,2081 1856,2096 1821,2096 1802,2077
  region: 1744,1795 1728.5,1779.5 1684,1779.5 1684,2086 1692,2094 1721,2094 1744,2071
  region: 890.5,2099.5 904.25,2085.75 904.25,2047 904.25,2037 879,2037 837.5,2037 678.5,2037 650.5,2017 650.5,1802 630.5,1782 373.5,1782 357.5,1802 357.5,2089 371,2099.5
Bottom Solder:
  region: 2397,1739 2397,1095 2333,1095 2333,1739
  region: 2635,1739 2635,1095 2571,1095 2571,1739
  region: 2636,2776 2636,2132 2572,2132 2572,2776
  region: 2399,2776 2399,2133 2336,2133 2336,2776
Drill Drawing:
  text ".Legend" at 2733,1708 h60 r90